# Altium PCB USB-IRIS-W1.PcbDoc (part 2 of 3)
Units mm, origin at the board's own origin, x right, y up, seen from the top; angles counter-clockwise.
Board outline 87.91 x 18 mm, 4 copper layers (Top Layer, Layer 2, Layer 3, Bottom Layer), stack 2.472 mm thick; 87 components, 85 nets, 417 pads, 400 vias.
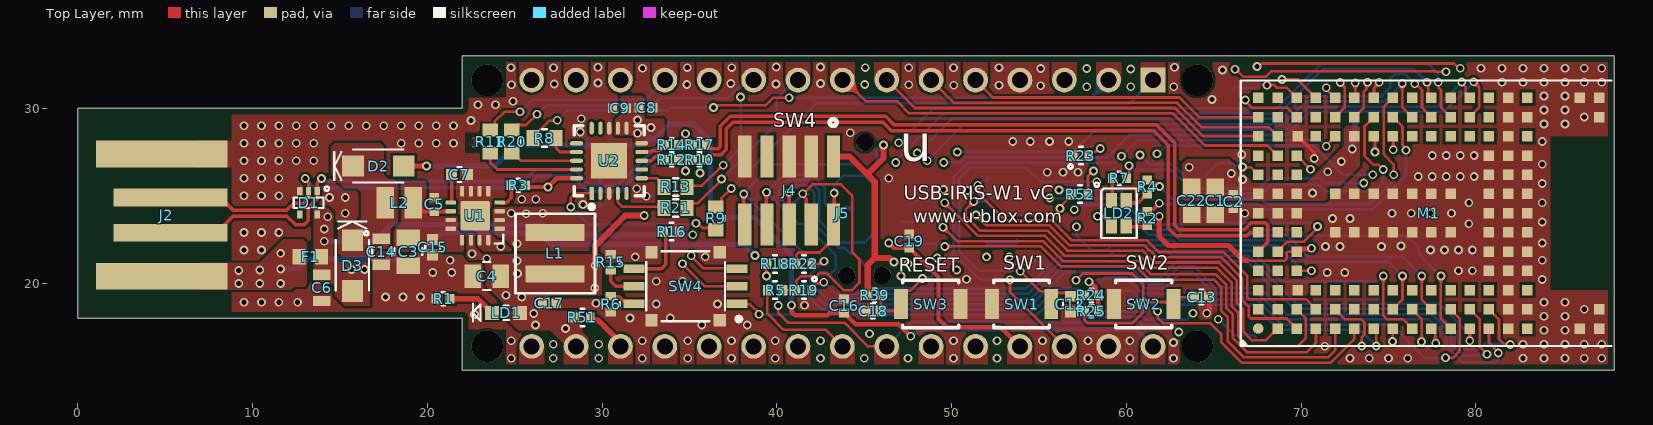
[diagram p0: Top Layer view]

## Via types
v1: diameter 0.5, hole 0.3, Top Layer to Bottom Layer, tented both sides, 234 vias
v2: diameter 0.5/0.5/0.5/0.5 (per signal layer), hole 0.3, Top Layer to Bottom Layer, tented both sides, 166 vias

## Nets (pads, with @x,y where several pads share a name; then routed paths per layer and width w, separated by ;. In a path a pad name is that pad's centre, name@x,y a point inside that pad or via, vN(x,y) a via of type N, cw(c..) or ccw(c..) an arc to the next point about the centre after c; other vN are vias at no path point) (continued)
EXT_GNT: (continued)
  Layer 3 w0.15: v2(34.6,21.1) 34.194,21.506 34.194,23.594 34.85,24.25 46.9,24.25 v1(49.55,26.9)
  Bottom Layer w0.15: v1(49.55,26.9) 50.512,26.9 50.802,27.19 58.89,27.19 60.175,28.475 69.196,28.475 70.521,29.8 78.162,29.8 v1(79.883,31.521)
EXT_PRI: M1.N14
EXT_REQ: M1.N12 SW4.3 TP2.1 | length 54.5
  Top Layer w0.15: v2(35.1,21.557) 35.1,21.515 35.765,20.85 37.694,20.85 SW4.3@37.726,20.818 ; v1(79.195,31.505) 79.195,31.41 79.425,31.18 79.425,30.825 M1.N12@79.65,30.6
  Layer 3 w0.15: v2(35.1,21.557) 35.079,21.557 34.625,22.012 34.625,23.55 35.025,23.95 47.45,23.95 50.325,26.825 v1(50.325,27.5)
  Bottom Layer w0.15: v1(50.325,27.5) 50.35,27.525 56.95,27.525 TP2.1@57.675,28.25 57.7,28.25 58.225,28.775 69.072,28.775 70.397,30.1 77.79,30.1 v1(79.195,31.505)
GND: C1.2 C2.2 C3.2 C4.2 C5.2 C6.2 C7.2 C8.2 C9.2 C10.2 C11.2 C12.2 C13.2 C14.2 C15.2 C16.2 C17.2 C18.2 C19.2 C20.2 C21.2 C22.2 D1.3 J2.4 J3.3 J4.3 J4.5 J4.9 J5.4 J5.29 M1.A15 M1.A19 M1.A20 M1.B15 M1.B16 M1.B20 M1.C3 M1.C15 M1.D14 M1.D15 M1.D16 M1.E14 M1.E15 M1.E16 M1.F5 M1.F6 M1.F7 M1.F8 M1.F9 M1.F10 M1.F11 M1.F14 M1.F15 M1.F16 M1.G1 M1.G2 M1.G3 M1.G14 M1.G15 M1.G16 M1.H5 M1.H6 M1.H7 M1.H8 M1.H9 M1.H10 M1.H11 M1.H14 M1.H15 M1.H16 M1.J14 M1.J15 M1.J16 M1.K14 M1.K15 M1.K16 M1.L3 M1.L15 M1.M15 M1.M16 M1.M20 M1.N15 M1.N19 M1.N20 R1.2 R6.2 R15.2 R16.2 R23.1 SW1.2 SW2.2 SW3.2 SW4.M1 SW4.M2 SW4.M3 SW4.M4 TP14.1 U1.5 U1.6 U1.7 U1.8 U1.15 U1.16 U1.EPAD U2.3 U2.13 U2.21 U3.4 | length 2.7
  Top Layer w0.2: M1.L3@69.8,28.4 70,28.2 70.743,27.457 70.743,27.136 v1(70.755,27.124)
  Top Layer w0.3: v1(64.6,18.28) 64.6,18.334 64.76,18.494 64.76,19.19 C13.2@64.75,19.2
  other v1: 72.8,15.7 73.9,15.7 75,15.7 76.1,15.7 82.7,15.7 83.9,15.7 85.1,15.7 86.2,15.7 87.2,15.7 71.349,16.383 27.2,16.5 29.8,16.5 82.7,16.5 83.9,16.5 85.1,16.5 86.2,16.5 87.2,16.5 62.7,16.6 24.8,16.7 32.3,16.7 34.9,16.7 37.4,16.7 39.9,16.7 42.5,16.7 50.1,16.7 52.6,16.7 55.2,16.7 57.8,16.7 60.2,16.7 45.3,17.1 83.9,17.3 85.1,17.3 83.9,18.1 85.1,18.1 22.7,18.2 86.2,18.5 36.6,18.8 60.275,18.9 83.9,18.9 85.1,18.9 17.6,19.2 18.6,19.2 19.6,19.2 83.8,20.2 20.3,20.6 21.4,20.6 71.5,20.6 79,20.7 79.8,20.7 21.3,21.3 83.8,21.3 77.4,21.9 78.2,21.9 79,21.9 79.8,21.9 71.4,22.1 72.225,22.1 75.717,22.123 83.8,22.3 79.6,23.4 83.8,23.5 71.8,23.7 72.8,23.7 15.3,24 75.2,24 76.3,24 77.4,24 78.6,24 79.6,24.6 83.8,24.6 14.4,24.9 15.3,24.9 50.902,25.298 49.53,25.349 83.8,25.7 46.4,26 76.7,26.1 77.5,26.1 78.3,26.1 79.1,26.1 79.9,26.1 83.8,26.8 77.5,27.3 78.3,27.3 79.1,27.3 79.9,27.3 66.596,27.359 53.5,28.1 54.5,28.1 55.6,28.1 56.7,28.1 83.8,28.1 44.2,28.6 83.9,29.1 85.1,29.1 22.5,29.3 86.2,29.5 83.9,29.9 85.1,29.9 22.9,30.2 23.9,30.2 24.9,30.4 64.897,30.505 83.9,30.7 85.1,30.7 81.5,31.5 82.7,31.5 83.9,31.5 85.1,31.5 86.2,31.5 87.2,31.5 65.5,32.2 80.3,32.3 81.5,32.3 82.7,32.3 83.9,32.3 85.1,32.3 86.2,32.3 87.2,32.3
  other v2: 24.8,15.7 27.2,15.7 29.8,15.7 32.3,15.7 34.9,15.7 37.4,15.7 39.9,15.7 42.5,15.7 45,15.7 47.5,15.7 50.1,15.7 52.6,15.7 55.2,15.7 57.8,15.7 60.2,15.7 62.7,15.7 35.7,17.6 38.3,17.6 31.6,18 33.9,18 41.575,18.725 33.1,18.8 29.642,18.847 9.5,18.9 10.5,18.9 11.5,18.9 12.573,18.898 33.1,20.1 34.6,20.1 50.851,20.218 72.5,20.6 31.9,21.5 35.9,21.5 9.5,21.9 10.5,21.9 24.2,22.1 74.6,22.1 9.5,22.9 10.5,22.9 11.5,22.9 66.777,24.003 28.9,24.5 25.4,24.8 26.2,24.8 32.525,24.975 9.5,25 10.5,25 11.5,25 31.975,25.4 9.5,26 10.5,26 11.5,26 35.6,26.3 55.474,26.34 56.374,26.34 57.232,26.344 9.5,27 10.5,27 11.5,27 12.5,27 13.5,27 9.5,28 10.5,28 11.5,28 12.5,28 13.5,28 18.5,28 19.5,28 20.5,28 21.5,28 28.753,28.651 9.5,29 10.5,29 11.5,29 12.5,29 13.5,29 14.5,29 15.5,29 16.5,29 17.5,29 18.5,29 19.5,29 20.5,29 21.5,29 28.804,29.398 57.734,31.242 60.249,31.242 62.713,31.242 55.093,31.293 50.114,31.318 52.705,31.318 24.816,31.344 47.549,31.344 34.849,31.369 45.034,31.369 27.254,31.394 39.954,31.394 37.356,31.427 42.494,31.42 29.769,31.445 60.25,32.25 55.1,32.28 57.73,32.28 27.22,32.32 32.31,32.3 47.54,32.32 50.11,32.32 24.79,32.33 29.76,32.35 34.87,32.33 37.41,32.33 45.06,32.33 52.71,32.33 62.75,32.35 39.96,32.37 42.5,32.37
GPIO11/UART3-DTR: J5.9 M1.A11 R21.2 | length 55.2
  Top Layer w0.15: R21.2@34.85,24.3 35.129,24.579 35.495,24.579 36.825,25.909 v1(36.825,25.95) ; v1(78,20.4) 78,17.95 M1.A11@78.55,17.4
  Layer 3 w0.15: J5.9@41.207,31.62 42.427,30.4 50.073,30.4 55.098,25.375 56.1,25.375 v1(56.15,25.325)
  Bottom Layer w0.15: v1(36.825,25.95) 40,29.125 40,30.572 41.048,31.62 J5.9@41.207,31.62 ; v1(56.15,25.325) 57.968,25.325 57.974,25.319 59.631,25.319 61.594,23.356 63.03,23.356 63.33,23.055 69.909,23.055 70.256,22.708 76.073,22.708 76.734,22.046 76.734,21.666 77.445,20.955 v1(78,20.4)
GPIO12/UART3-DSR: J5.10 M1.B10 R20.2 | length 60
  Top Layer w0.15: R20.2@24.834,28.75 25.134,29.05 25.654,29.05 26.262,29.658 v2(26.275,29.658) ; v1(76.9,20.4) 76.9,19.05 M1.B10@77.45,18.5
  Layer 3 w0.15: J5.10@38.667,31.62 40.187,30.1 49.949,30.1 55.186,24.863 v1(55.612,24.863)
  Bottom Layer w0.15: v2(26.275,29.658) 26.792,30.175 32.875,30.175 33.275,30.575 37.175,30.575 37.725,31.125 37.844,31.125 38.339,31.62 J5.10@38.667,31.62 ; v1(55.612,24.863) 55.625,24.85 59.675,24.85 61.469,23.056 62.898,23.056 63.199,22.755 69.16,22.755 70.406,21.509 75.791,21.509 v1(76.9,20.4)
GPIO22: M1.J1 TP11.1 | length 3.6
  Top Layer w0.15: v1(66.65,26.645) 66.657,26.637 67.113,26.637 M1.J1@67.55,26.2
  Bottom Layer w0.15: TP11.1@64.525,26.15 65.248,26.873 66.074,26.873 66.235,26.712 66.583,26.712 v1(66.65,26.645)
GPIO27: M1.E2 TP12.1 | length 9.9
  Top Layer w0.15: M1.E2@68.65,21.8 69.225,22.375 70.175,22.375 70.806,23.006 70.806,23.01 70.942,23.146 v1(70.942,23.241)
  Bottom Layer w0.15: TP12.1@64.24,23.79 64.413,23.79 64.753,23.45 70.679,23.45 70.888,23.241 v1(70.942,23.241)
GPIO37: M1.D3 TP4.1 | length 13.8
  Top Layer w0.15: M1.D3@69.75,20.7 v1(70.6,20.7)
  Bottom Layer w0.15: TP4.1@58.4,22.6 58.544,22.456 62.649,22.456 62.95,22.155 68.645,22.155 70.1,20.7 v1(70.6,20.7)
GPIO42/BLUE: M1.M8 R2.2 | length 19.6
  Top Layer w0.15: M1.M8@75.25,29.5 75.8,28.95 75.8,27.895 76,27.695 v1(76,27.6)
  Top Layer w0.2: R2.2@61.2,24.1 61.338,24.238 61.563,24.238 61.882,24.557 v1(61.882,24.575)
  Bottom Layer w0.15: v1(61.882,24.575) 61.932,24.525 67.575,24.525 67.875,24.225 74.074,24.225 76,26.151 v1(76,27.6)
GPIO43/GREEN: M1.N8 R4.2 | length 20.4
  Top Layer w0.15: M1.N8@75.25,30.6 74.725,30.075 74.725,27.375 75.3,26.8 v1(75.3,26.2)
  Top Layer w0.2: R4.2@61.2,25.9 61.36,25.74 61.606,25.74 61.819,25.527 v1(61.9,25.527)
  Bottom Layer w0.15: v1(61.9,25.527) 61.936,25.527 62.638,24.825 67.729,24.825 68.029,24.525 73.949,24.525 75.276,25.852 75.276,26.176 v1(75.3,26.2)
GPIO44/RED: M1.M7 R7.2 | length 21.1
  Top Layer w0.15: R7.2@60,26 60.155,26.155 v1(60.155,26.711) ; M1.M7@74.15,29.5 73.625,28.975 73.625,27.275 74.133,26.767 74.433,26.767 v1(74.7,26.5)
  Bottom Layer w0.15: v1(60.155,26.711) 60.199,26.711 60.418,26.492 62.56,26.492 63.927,25.125 67.776,25.125 68.276,25.625 71.026,25.625 71.401,25.25 74.15,25.25 74.7,25.8 v1(74.7,26.5)
GPIO45: J5.19 M1.N7 | length 53
  Top Layer w0.15: M1.N7@74.15,30.6 74.168,30.618 74.168,31.154 74.473,31.459 v1(74.473,31.494)
  Layer 3 w0.15: J5.19@33.587,16.38 33.587,16.512 36.6,19.525 49.711,19.525 50.036,19.2 59.024,19.2 60.549,20.725 64.974,20.725 68,23.751 68,29.825 70.728,32.553 73.492,32.553 74.473,31.572 v1(74.473,31.494)
GPIO46: J5.20 M1.M6 | length 50.7
  Top Layer w0.15: M1.M6@73.05,29.5 73.575,30.025 73.575,30.943 73.736,31.104 73.736,31.427 v1(73.803,31.494)
  Layer 3 w0.15: J5.20@36.127,16.38 38.973,19.225 49.371,19.225 49.697,18.9 59.149,18.9 60.674,20.425 65.099,20.425 68.3,23.626 68.3,29.701 70.852,32.253 73.044,32.253 v1(73.803,31.494)
GPIO47: J5.21 M1.N6 | length 45.5
  Top Layer w0.15: M1.N6@73.05,30.6 73.101,30.651 v1(73.101,31.471)
  Layer 3 w0.15: J5.21@38.667,16.38 40.391,18.104 42.507,18.104 43.003,18.6 59.273,18.6 60.798,20.125 65.223,20.125 68.6,23.502 68.6,29.576 70.977,31.953 72.619,31.953 v1(73.101,31.471)
GPIO48: J5.22 M1.M5 | length 43.3
  Top Layer w0.15: M1.M5@71.95,29.5 72.175,29.725 72.175,29.732 72.492,30.048 72.492,31.215 72.238,31.469 v1(72.238,31.478)
  Layer 3 w0.15: J5.22@41.207,16.38 43.127,18.3 61.025,18.3 62.55,19.825 65.347,19.825 68.9,23.378 68.9,29.452 71.101,31.653 71.634,31.653 71.763,31.525 72.191,31.525 v1(72.238,31.478)
GPIO49: J5.25 M1.N5 | length 32.9
  Top Layer w0.15: v1(71.437,31.178) 71.437,31.113 M1.N5@71.95,30.6
  Layer 3 w0.15: J5.25@48.827,16.38 50.147,17.7 61.769,17.7 63.594,19.525 65.527,19.525 69.2,23.198 69.2,28.941 v1(71.437,31.178)
GPIO53: M1.N3 TP3.1 | length 4.1
  Top Layer w0.15: v1(68.047,31.326) 68.072,31.351 68.426,31.351 68.597,31.181 69.169,31.181 M1.N3@69.75,30.6
  Bottom Layer w0.15: TP3.1@66.1,31.1 66.175,31.175 67.395,31.175 67.569,31.348 68.024,31.348 v1(68.047,31.326)
GPIO56/D3: J5.6 M1.L2 | length 21.2
  Top Layer w0.15: J5.6@48.827,31.62 50.13,30.318 62.91,30.318 64.3,28.928 68.122,28.928 M1.L2@68.65,28.4
GPIO57/D4: J5.7 M1.L1 | length 22.6
  Top Layer w0.15: J5.7@46.287,31.62 47.89,30.018 62.786,30.018 64.404,28.4 M1.L1@67.55,28.4
GPIO58/D5: J5.8 M1.K2 | length 26.7
  Top Layer w0.15: J5.8@43.747,31.62 43.88,31.62 45.1,30.4 46.891,30.4 47.573,29.718 62.662,29.718 64.505,27.875 68.075,27.875 M1.K2@68.65,27.3
GPIO61: J5.26 M1.K3 | length 25.9
  Top Layer w0.15: M1.K3@69.75,27.3 70.536,26.514 v1(70.536,26.511)
  Layer 3 w0.15: J5.26@51.367,16.38 52.387,17.4 61.952,17.4 63.777,19.225 65.651,19.225 69.5,23.074 69.5,25.475 v1(70.536,26.511)
GPIO62/D2: J5.5 M1.M1 | length 17.1
  Top Layer w0.15: J5.5@51.367,31.62 52.37,30.618 63.035,30.618 64.153,29.5 M1.M1@67.55,29.5
I2C-SCL: J5.24 M1.B5 R18.1 | length 42.8
  Top Layer w0.15: v2(39.4,20.4) 39.4,21.05 R18.1@39.45,21.1 ; v2(40.081,18.72) 40.081,18.279 40.63,17.73 43.87,17.73 45.22,16.38 J5.24@46.287,16.38 ; M1.B5@71.95,18.5 72.525,17.925 73.443,17.925 73.625,17.743 73.625,17.057 73.475,16.907 v1(73.475,16.401)
  Layer 3 w0.15: v1(63,17.2) 63,17.278 63.347,17.625 64.875,17.625 66.1,16.4 70.324,16.4 70.917,16.993 72.883,16.993 v1(73.475,16.401)
  Bottom Layer w0.15: v2(39.4,20.4) 40.081,19.719 v2(40.081,18.72) ; J5.24@46.287,16.38 47.683,17.775 60.711,17.775 60.884,17.602 62.636,17.602 63,17.239 v1(63,17.2)
I2C-SDA: J5.23 M1.A6 R5.1 | length 39.4
  Top Layer w0.15: R5.1@39.45,19.6 39.45,18.25 40.371,17.329 42.798,17.329 J5.23@43.747,16.38 ; v1(61.786,18.389) 61.793,18.382 61.793,18.025 62.118,17.7 64.815,17.7 65.425,17.09 65.425,16.625 66.6,15.45 71.7,15.45 73.05,16.8 M1.A6@73.05,17.4
  Layer 3 w0.15: J5.23@43.747,16.38 45.367,18 61.375,18 61.764,18.389 v1(61.786,18.389)
IOREF: J5.18 R51.2 | length 2.8
  Top Layer w0.3: R51.2@29.273,18.031 29.423,17.881 29.769,17.881 31.047,16.603 J5.18@31.047,16.38
  Bottom Layer w0.3: J5.18@31.047,16.38 J5.18@31.047,16.552
JTAG-nTRST: J3.10 J4.10 M1.B11 | length 59.4
  Top Layer w0.15: v1(78.257,15.723) 78.689,15.723 79.075,16.108 79.075,17.975 M1.B11@78.55,18.5
  Top Layer w0.2: v1(38.1,25.1) 38.1,23.41 J4.10@38.16,23.35
  Bottom Layer w0.15: J3.10@44.38,26.78 44.36,26.8 39.776,26.8 38.1,25.124 41.6,21.624 41.6,19.475 42.584,18.491 54.762,18.491 55.956,19.685 57.206,19.685 57.51,19.38 57.836,19.38 58.781,20.325 59.978,20.325 60.909,19.395 62.33,19.395 62.67,19.055 67.483,19.055 68.916,17.621 75.179,17.621 77.103,15.697 78.232,15.697 v1(78.257,15.723)
JTAG-TCK: M1.B14 R19.1 | length 47.3
  Top Layer w0.15: R19.1@42,19.6 42,19.65 42.326,19.976 42.616,19.976 v2(42.682,20.043) ; M1.B14@80.75,18.5 81.325,17.925 81.325,16.795 81.615,16.505 81.945,16.505 v1(81.966,16.485)
  Bottom Layer w0.15: v2(42.682,20.043) 43.334,19.391 54.39,19.391 56.233,21.235 60.341,21.235 61.276,20.3 61.938,20.3 62.893,21.255 66.871,21.255 69.605,18.521 77.579,18.521 78.9,17.2 78.9,16.665 79.36,16.205 80.162,16.205 80.474,16.517 81.934,16.517 v1(81.966,16.485)
JTAG-TDI: J3.8 J4.8 M1.B12 | length 63
  Top Layer w0.15: M1.B12@79.65,18.5 80.225,17.925 80.225,16.335 v1(80.634,15.926)
  Top Layer w0.2: v1(39.4,25.2) 39.4,23.38 J4.8@39.43,23.35
  Bottom Layer w0.15: 43.888,24.332 44.288,24.332 J3.8@44.38,24.24 43.055,24.24 42.729,24.566 42.729,25.491 42.02,26.2 40.4,26.2 v1(39.4,25.2) 41.195,23.405 41.545,23.405 43.375,21.575 43.375,20.825 43.068,20.518 42.486,20.518 42.2,20.232 42.2,19.725 42.834,19.091 54.514,19.091 56.358,20.935 60.217,20.935 61.152,20 62.062,20 63.017,20.955 63.884,20.955 65.113,19.726 67.66,19.726 69.165,18.221 77.454,18.221 78.6,17.076 78.6,16.541 79.266,15.875 80.584,15.875 v1(80.634,15.926)